# Altium PCB Breakout_PCB.PcbDoc
Units mm, origin at the board's own origin, x right, y up, seen from the top; angles counter-clockwise.
Board outline 68.07 x 57.15 mm, 2 copper layers (Top Layer, Bottom Layer); 10 components, 18 nets, 76 pads, 4 vias.
Unrouted connection lines stored in the file: 3.
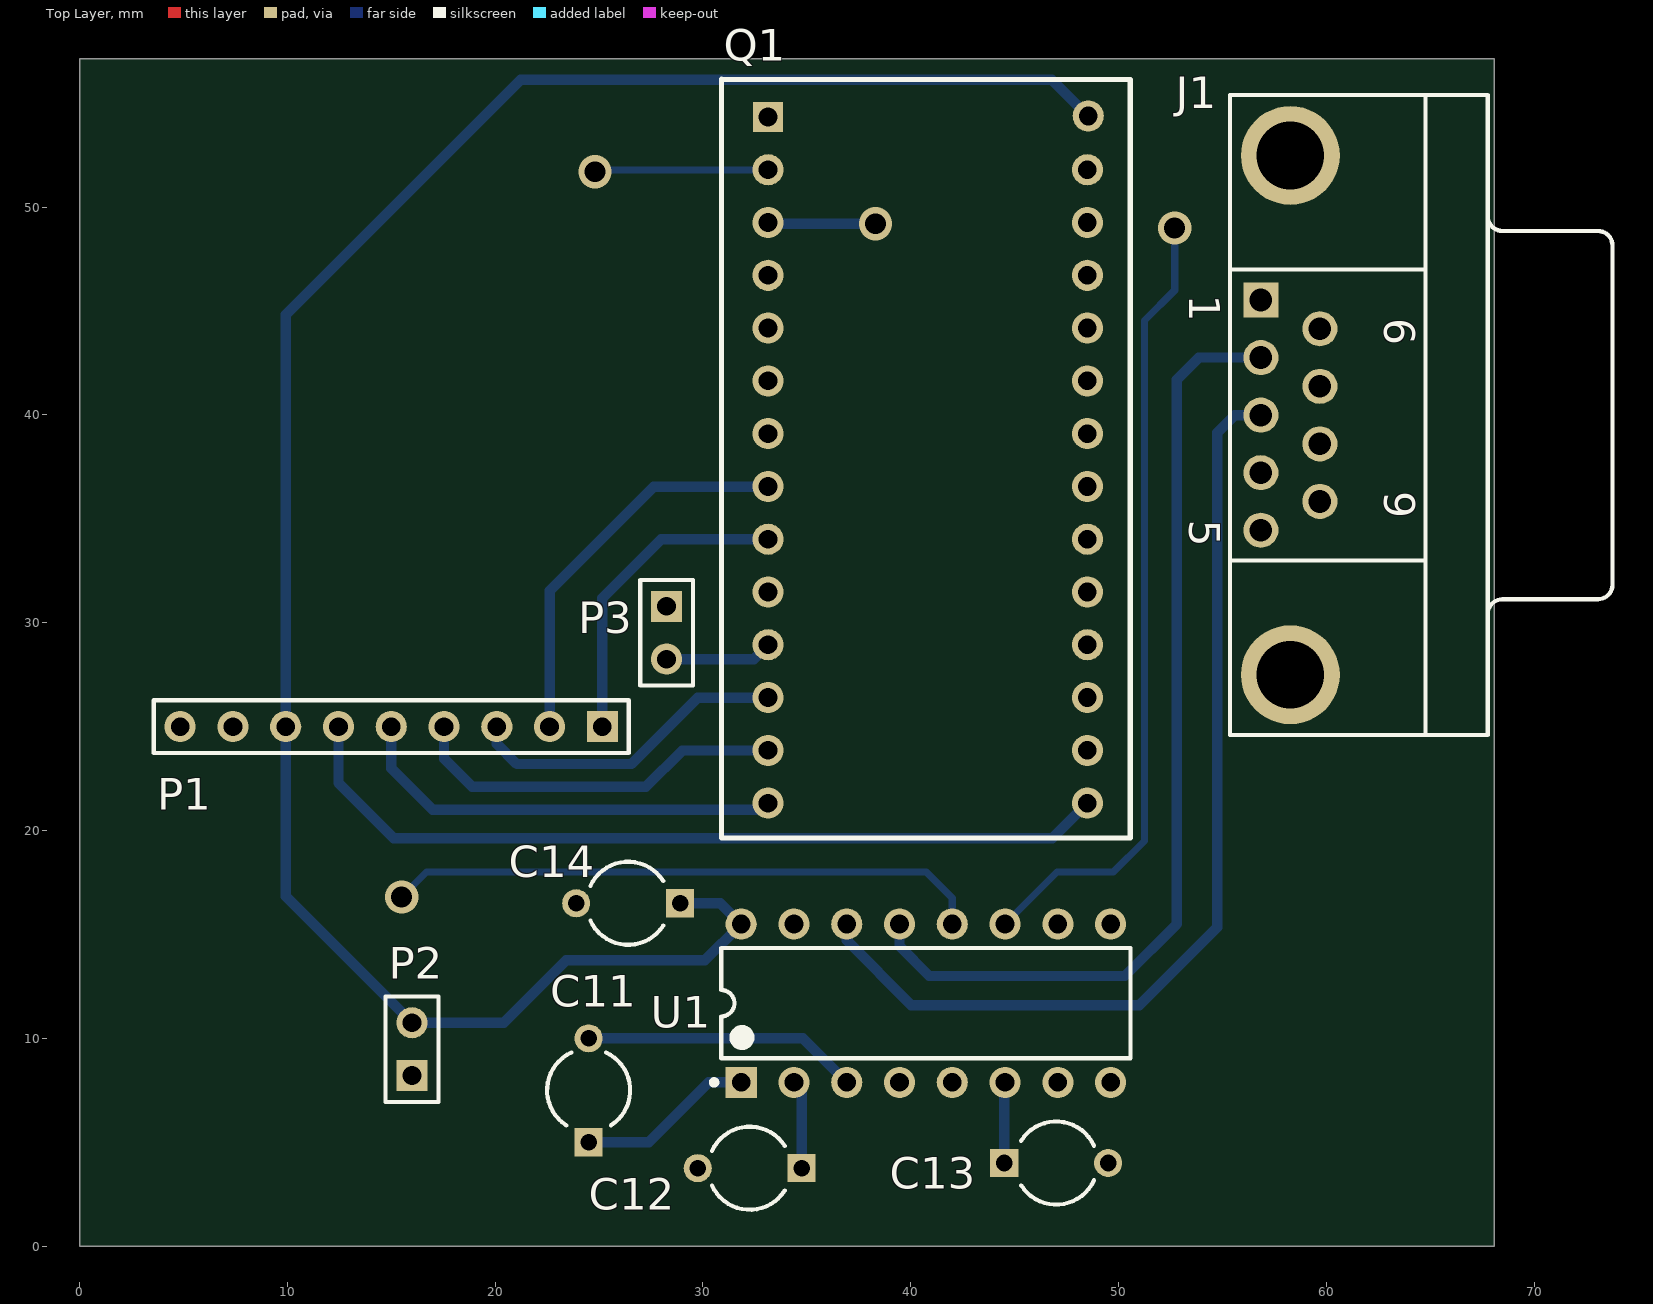
[diagram p0: Top Layer view]
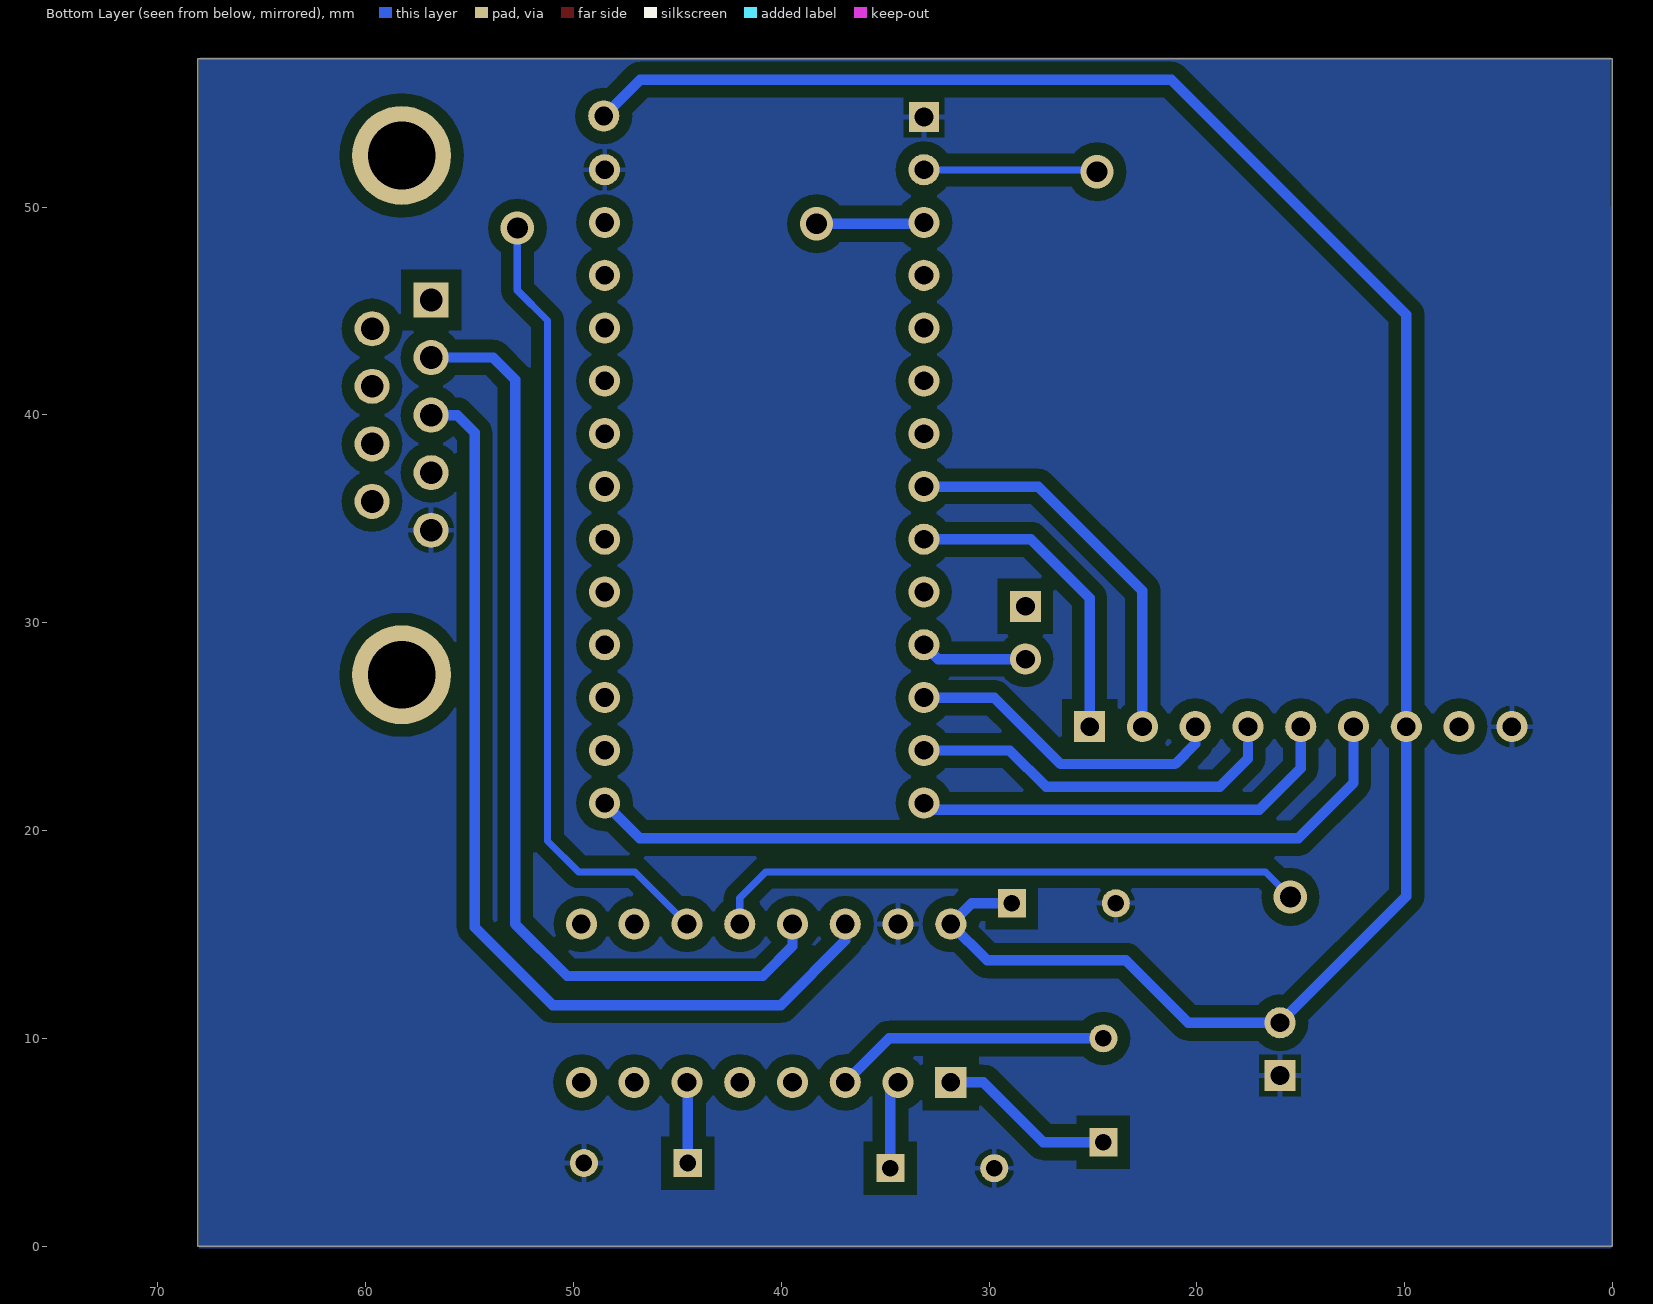
[diagram p1: Bottom Layer view, seen from below]

## Layer stack, top to bottom
Top Solder: solder mask 0.0102, Solder Resist, Dk 3.5
Top Layer: signal copper 0.0356
Dielectric 1: dielectric 0.32, FR-4, Dk 4.8
Bottom Layer: signal copper 0.0356
Bottom Solder: solder mask 0.0102, Solder Resist, Dk 3.5

## Board outline
0,0 68.072,0 68.072,57.15 0,57.15

## Design rules (kind name [scope] priority, off if disabled: settings)
Clearance [All] p1: gap=0.6
PolygonConnect [All] p1: connectstyle=Relief reliefconductorwidth=0.254 reliefentries=4 polygonreliefangle="90 Angle" airgapwidth=0.254
RoutingVias [All] p1: holewidth=0.711 width=1.27 viastyle="Through Hole" minholewidth=0.711 minwidth=1.27 maxholewidth=0.711 maxwidth=1.27
SolderMaskExpansion [All] p1: expansion=0.102
Width [All] p1: maxlimit=5 minlimit=0.254 preferedwidth=0.3 minimp=50.000000 maximp=50.000000 favimp=50.000000
30 further rules are at their usual default settings.

## Components (designator, comment, footprint, x,y, rotation, side; value= is the part's Value field where it differs from the comment)
C11 "Cap2" CAPR5-4X5 24.5,7.5 r90 top
C12 "Cap2" CAPR5-4X5 32.25,3.75 r180 top
C13 "Cap2" CAPR5-4X5 47,4 r0 top
C14 "Cap2" CAPR5-4X5 26.4,16.5 r180 top
J1 "D Connector 9" DSUB1.385-2H9 67.77,39.993 r270 top
P1 "Header 9" HDR1X9 25.16,25 r180 top
P2 "Header 2" HDR1X2 16,8.21 r90 top
P3 "Header 2" HDR1X2 28.25,30.79 r270 top
Q1 "TeensyLC" TeensyLC 33.133,54.34 r0 top
U1 "MAX232ECN" TI-N16 40.73,11.69 r90 top

## Footprints (in the part's own frame and the unit in brackets; to place one, negate y for a bottom-side part, rotate by r counter-clockwise, add the part's x,y. Pads: shape width x height; smd on the part's side, far side on the other; paste and mask are expansions set on the pad)
CAPR5-4X5 [mm] "Capacitor; 2 Leads"
  rect 1.35x1.35 hole 0.8: 1(-2.5,0)
  round 1.35 hole 0.8: 2(2.5,0)
  silkscreen extent -1.69,-2 1.82,2
DSUB1.385-2H9 [mm] "Connector; D Subminiature; 9 Position; Right Angle; Pitch 1.385 mm"
  rect 1.69x1.69 hole 1.09: 1(-5.54,-10.92)
  round 1.69 hole 1.09: 2(-2.77,-10.92) 3(0,-10.92) 4(2.77,-10.92) 5(5.54,-10.92) 6(-4.155,-8.08) 7(-1.385,-8.08) 8(1.385,-8.08) 9(4.155,-8.08)
  round 4.76 hole 3.26: 10(-12.495,-9.5) 11(12.495,-9.5)
  silkscreen extent -15.4,-12.4 15.4,6
HDR1X2 [mm] "Connector; Header; 2 Position"
  rect 1.5x1.5 hole 0.9: 1(0,0)
  round 1.5 hole 0.9: 2(2.54,0)
  silkscreen extent -1.27,-1.27 3.81,1.27
HDR1X9 [mm] "Connector; Header; 9 Position"
  rect 1.5x1.5 hole 0.9: 1(0,0)
  round 1.5 hole 0.9: 2(2.54,0) 3(5.08,0) 4(7.62,0) 5(10.16,0) 6(12.7,0) 7(15.24,0) 8(17.78,0) 9(20.32,0)
  silkscreen extent -1.27,-1.27 21.59,1.27
TeensyLC [mm] "Teensy LC Footprint"
  rect 1.45x1.45 hole 0.9: 1(0,0)
  round 1.5 hole 0.9: 2(0,-2.54) 3(0,-5.08) 4(0,-7.62) 5(0,-10.16) 6(0,-12.7) 7(0,-15.24) 8(0,-17.78) 9(0,-20.32) 10(0,-22.86) 11(0,-25.4) 12(0,-27.94) 13(0,-30.48) 14(0,-33.02) 15(15.367,-33.02) 16(15.367,-30.48) 17(15.367,-27.94) 18(15.367,-25.4) 19(15.367,-22.86) 20(15.367,-20.32) 21(15.367,-17.78) 22(15.367,-15.24) 23(15.367,-12.7) 24(15.367,-10.16) 25(15.367,-7.62) 26(15.367,-5.08) 27(15.367,-2.54) 28(15.41,0.05)
  silkscreen extent -2.24,-34.7 17.43,1.82
TI-N16 [mm] "DIP, 16-Leads, Row Spacing 7.62mm, Pitch 2.54mm, Body 19.3x6.4mm"
  rect 1.5x1.5 hole 0.9: 1(-3.81,8.89)
  round 1.5 hole 0.9: 2(-3.81,6.35) 3(-3.81,3.81) 4(-3.81,1.27) 5(-3.81,-1.27) 6(-3.81,-3.81) 7(-3.81,-6.35) 8(-3.81,-8.89) 9(3.81,-8.89) 10(3.81,-6.35) 11(3.81,-3.81) 12(3.81,-1.27) 13(3.81,1.27) 14(3.81,3.81) 15(3.81,6.35) 16(3.81,8.89)
  silkscreen extent -3.93,-9.85 2.65,10.31, body extent -3.3,-9.85 3.3,9.85, height 5.08

## Part data
C11 C12 C13 C14: "Capacitor"
J1: "Receptacle Assembly, 9 Position, Right Angle"
P1: "Header, 9-Pin"
P2 P3: "Header, 2-Pin"
U1: "Dual RS-232 Driver / Receiver with IEC61000-4-2 Protection, 0 to 70 degC, 16-Pin PDIP (N),  Pb-Free (RoHS)"

## Via types
v1: diameter 1.6, hole 1, Top Layer to Bottom Layer, 4 vias

## Nets (pads, with @x,y where several pads share a name; then routed paths per layer and width w, separated by ;. In a path a pad name is that pad's centre, name@x,y a point inside that pad or via, vN(x,y) a via of type N, cw(c..) or ccw(c..) an arc to the next point about the centre after c; other vN are vias at no path point)
3V3: P1.8
CLK: P1.6 Q1.15 | length 40.5
  Bottom Layer w0.5: P1.6 12.46,22.29 15.12,19.63 46.82,19.63 Q1.15@48.5,21.31
CS: P1.3 Q1.12 | length 15.6
  Bottom Layer w0.5: P1.3 20.08,24.17 21.05,23.2 26.56,23.2 29.75,26.39 Q1.12@33.133,26.39
GROUND: C12.2 C13.2 C14.2 J1.5 P1.9 P2.1 Q1.1 Q1.27 U1.15
IRQ: P1.1 Q1.9 | length 15.3
  Bottom Layer w0.5: P1.1 25.16,31.17 28,34.01 Q1.9@33.133,34.01
MISO: P1.5 Q1.14 | length 21.1
  Bottom Layer w0.5: P1.5 15,23 17,21 32.823,21 Q1.14@33.133,21.31
MOSI: P1.4 Q1.13 | length 18.4
  Bottom Layer w0.5: P1.4 17.54,23.46 18.9,22.1 27.25,22.1 29,23.85 Q1.13@33.133,23.85
NetC11_1: C11.1 U1.1 | length 8.5
  Bottom Layer w0.5: C11.1 27.39,5 30.27,7.88 U1.1
NetC11_2: C11.2 U1.3 | length 13.3
  Bottom Layer w0.5: C11.2 34.8,10 U1.3
NetC12_1: C12.1 U1.2 | length 4.3
  Bottom Layer w0.5: U1.2 34.75,7.51 C12.1
NetC13_1: C13.1 U1.6 | length 3.9
  Bottom Layer w0.5: C13.1 44.5,7.84 U1.6
NetJ1_2: J1.2 U1.13 | length 46.7
  Bottom Layer w0.5: U1.13 39.46,14.44 40.9,13 50.3,13 52.8,15.5 52.8,41.7 53.863,42.763 J1.2
NetJ1_3: J1.3 U1.14 | length 47.7
  Bottom Layer w0.5: U1.14 36.92,14.71 40.03,11.6 51,11.6 54.75,15.35 54.75,39.143 55.6,39.993 J1.3
NetP3_2: P3.2 Q1.11 | length 5.2
  Bottom Layer w0.5: P3.2 32.453,28.25 Q1.11@33.133,28.93
NetQ1_2: Q1.2 U1.12 | length 37.1
  Bottom Layer w0.35: v1(15.5,16.8) 16.7,18 40.75,18 42,16.75 U1.12 ; v1@24.8,51.79 Q1.2@33.133,51.79
  other v1: 24.8,51.7
NetQ1_3: Q1.3 U1.11 | length 43.7
  Bottom Layer w0.35: U1.11 47.04,18 49.75,18 51.25,19.5 51.25,44.55 52.7,46 v1(52.7,49)
  Bottom Layer w0.5: Q1.3 33.193,49.2 v1(38.3,49.2)
VBAT: C14.1 P1.7 P2.2 Q1.28 U1.16 | length 101.7
  Bottom Layer w0.5: C14.1@29,16.5 30.84,16.5 U1.16 30.09,13.75 23.425,13.75 20.425,10.75 P2.2 9.92,16.83 P1.7 9.92,44.82 21.24,56.14 46.783,56.14 Q1.28@48.543,54.38
VBEN: P1.2 Q1.8 | length 19.1
  Bottom Layer w0.5: P1.2 22.62,31.537 27.633,36.55 Q1.8@33.133,36.55
pads on no net: J1.1 J1.4 J1.6 J1.7 J1.8 J1.9 J1.10 J1.11 P3.1 Q1.4 Q1.5 Q1.6 Q1.7 Q1.10 Q1.16 Q1.17 Q1.18 Q1.19 Q1.20 Q1.21 Q1.22 Q1.23 Q1.24 Q1.25 Q1.26 U1.4 U1.5 U1.7 U1.8 U1.9 U1.10

## Polygon pours and split planes (outlines as drawn)
GROUND on Bottom Layer "Bottom Layer-GND" (solid, pour order 4): 0,-0.1 68,-0.1 68,57.1 68.1,57.2 0.1,57.2

## Silkscreen, mask and mechanical layers (free items; w line width, h text height)
Mechanical 1:
  lines w0.25: 0,-0.1 -0.1,-0.1 -0.1,57.2 68.1,57.2 ; 0,-0.1 68.1,-0.1 ; 0,-0.1 68.1,-0.1 ; 68.1,-0.1 68.1,57.2 ; 68.1,-0.1 68.1,57.2

## Text inside footprints (layer, text, board x,y; h text height)
J1: Top Overlay "1" at 53.395,45.783 h1.5 r270; Top Overlay "5" at 53.395,34.953 h1.5 r270; Top Overlay "9" at 62.795,36.338 h1.5 r270; Top Overlay "6" at 62.795,44.648 h1.5 r270